# EAGLE board Tilt-PIC12F635 (EAGLE 6.4)

Size 100 x 80 mm. Coordinates in mm from the lower left corner, seen from the top.
Outline: 0,0 100,0 100,80 0,80 0,0
Copper layers (1*16): Top 0.035mm / dielectric 1.5mm / Bottom 0.035mm
Design rules "default": minimum track width 10mil, minimum drill 24mil, track to track 8mil, track to pad 8mil, pad to pad 8mil, via to via 8mil, smd to smd 8mil, copper to edge 40mil, drill to drill 8mil, minimum pad ring 10mil, minimum via ring 8mil, stop-mask expansion 4mil, vias tented up to drill 0mil, thermal gap 10mil

## Footprints (pad centres in the part's own frame; a part is rotated, then mirrored left to right if it is on the bottom)
DO35-10 = drill 0.813 long: A 5.08,0; C -5.08,0
085CS_1AR = smd 2.9 x 2.5: + 3.25,0; - -3.25,0
C025-024X044 = drill 0.813 octagon: 1 -1.27,0; 2 1.27,0
78LXX = drill 0.813 octagon: GND 0,1.905; IN 1.27,0; OUT -1.27,0
LED5MM = drill 0.813 octagon: A -1.27,0; K 1.27,0
MAMMUTH03 = drill 0.5 pad 3.81 square: P$1 0,-5.08 | drill 0.5 pad 3.81 octagon: P$2 0,0; P$3 0,5.08
0207/12 = drill 0.813 octagon: 1 -6.35,0; 2 6.35,0
SIP02 = drill 0.889 pad 2.032 long: 1 0,1.27; 2 0,-1.27
DIL8 = drill 0.813 long: 1 -3.81,-3.81; 2 -1.27,-3.81; 3 1.27,-3.81; 4 3.81,-3.81; 5 3.81,3.81; 6 1.27,3.81; 7 -1.27,3.81; 8 -3.81,3.81
SIP06 = drill 0.8 pad 2.032 long: 1 0,0; 2 0,2.54; 3 0,5.08; 4 0,7.62; 5 0,10.16; 6 0,12.7

## Placement (x,y rotation side)
*D3  1N4148  [DO35-10]  -20.32,31.75 0 top  (outside the outline)
C1  100uF  [085CS_1AR]  -19.05,24.13 0 top  (outside the outline)
C2  100uF  [085CS_1AR]  -30.48,24.13 0 top  (outside the outline)
C3  [C025-024X044]  -44.45,-8.89 0 top  (outside the outline)
D1  1N4148  [DO35-10]  -35.56,31.75 0 top  (outside the outline)
D2  1N4148  [DO35-10]  -20.32,38.1 0 top  (outside the outline)
IC1  [78LXX]  -43.18,36.83 0 top  (outside the outline)
LED1  [LED5MM]  -44.45,22.86 0 top  (outside the outline)
MM3  MAMMUTH03  [MAMMUTH03]  -16.51,11.43 0 top  (outside the outline)
R1  4K7  [0207/12]  -20.32,43.18 0 top  (outside the outline)
R2  4K7  [0207/12]  -35.56,43.18 0 top  (outside the outline)
R3  4K7  [0207/12]  -39.37,-3.81 0 top  (outside the outline)
R4  4K7  [0207/12]  -20.32,48.26 0 top  (outside the outline)
TILT  PULSANTENO  [SIP02]  -34.29,38.1 0 top  (outside the outline)
U$1  PIC12F635  [DIL8]  -27.94,6.35 0 top  (outside the outline)
U$3  SIP06  [SIP06]  -41.91,2.54 0 top  (outside the outline)

## Library data of the parts
*D3 D1 D2 = diode
C1-C3 = Ln-RCL
IC1 = Ln-v-reg
LED1 = Ln-TransDiodi
MM3 TILT U$3 = Ln-Varie
R1-R4 = rcl
U$1 = LN-microchip

## Nets
+12V: C1.+ IC1.IN MM3.P$3
AUXILLARY: U$3.6
GND: C2.-
ICSPCLK: U$3.5
ICSPDAT: U$3.4
N$2: LED1.A R1.2
N$3: R1.1 U$1.2
N$5: *D3.A C2.+ R2.2
N$6: D1.C D2.C R4.2
OUT: MM3.P$2
SENSORE: R4.1
VDD: IC1.OUT R2.1 U$1.1 U$3.2
VPP/MCLR: *D3.C U$1.4 U$3.1
VSS: C1.- IC1.GND LED1.K MM3.P$1 TILT.2 U$1.8 U$3.3

## Tracks (layer width: path | path; a pad name or v marks a point on that pad's centre or on a via)
+12V  (2 unrouted)
N$2  (1 unrouted)
N$3  (1 unrouted)
N$5  (2 unrouted)
N$6  (2 unrouted)
VDD  (3 unrouted)
VPP/MCLR  (2 unrouted)
VSS  (6 unrouted)